# Altium PCB 2layer.PcbDoc
Units mil, origin at the board's own origin, x right, y up, seen from the top; angles counter-clockwise.
Board outline 6000 x 4000 mil, 2 copper layers (Top Layer, Bottom Layer); 88 components, 70 nets, 356 pads, 0 vias.
Unrouted connection lines stored in the file: 246.
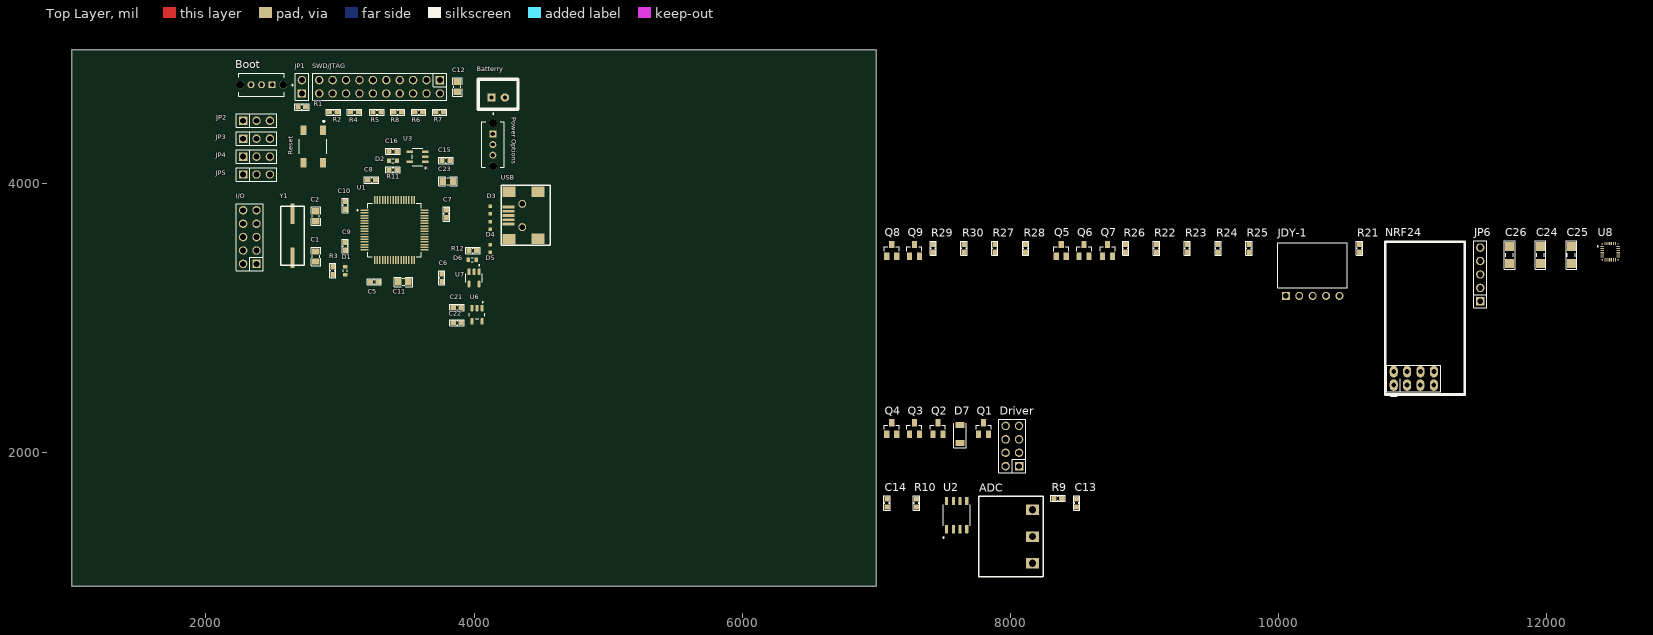
[diagram p0: Top Layer view]
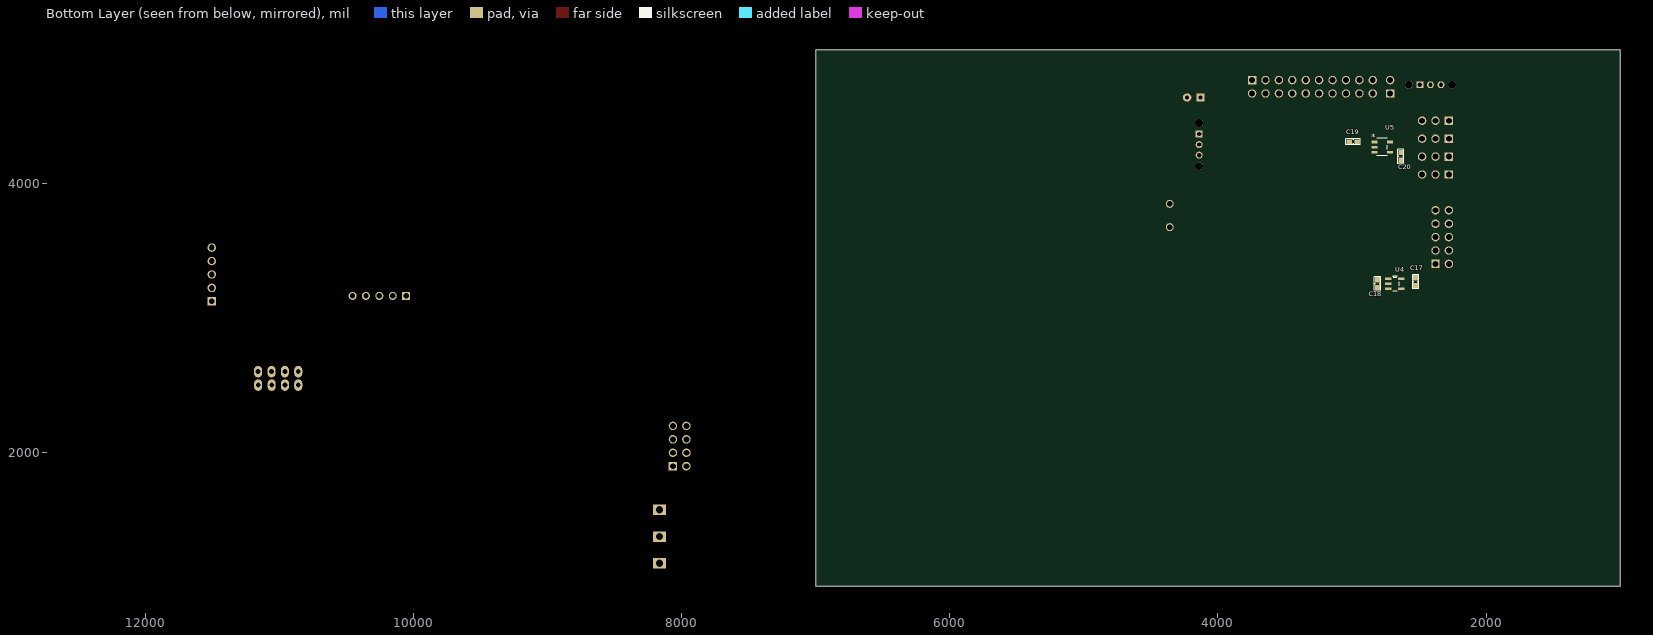
[diagram p1: Bottom Layer view, seen from below]

## Layer stack, top to bottom
Top Solder: solder mask 0.4, Solder Resist, Dk 3.5
Top Layer: signal copper 1.4
Dielectric 1: dielectric 12.6, FR-4, Dk 4.8
Bottom Layer: signal copper 1.4
Bottom Solder: solder mask 0.4, Solder Resist, Dk 3.5

## Board outline
1000,1000 7000,1000 7000,5000 1000,5000

## Design rules (kind name [scope] priority, off if disabled: settings)
Clearance [All] p1: gap=10 ignorepadtopadclearanceinfootprint=FALSE except(0: Arc-Hole Track-Hole SMDPad-Hole THPad-Hole Via-Hole Fill-Hole Poly-Hole Region-Hole Text-Hole)
DiffPairsRouting [All] p1: maxlimit=10 minlimit=10 mostfreqgap=10 toplayer_minwidth=15 toplayer_maxwidth=15 toplayer_prefwidth=15 bottomlayer_minwidth=15 bottomlayer_maxwidth=15 bottomlayer_prefwidth=15 maxuncoupledlength=500
PolygonConnect [All] p1: connectstyle=Relief reliefconductorwidth=10 reliefentries=4 polygonreliefangle="90 Angle" airgapwidth=10
RoomDefinition PWR_SRC [InComponentClass('PWR_SRC')] p1: confinementstyle=ConfineIn formatcopy=TRUE lockcomponents=FALSE outline 7045,3735 13215,3735 13215,4315 7045,4315
RoomDefinition STM32_MCU [InComponentClass('STM32_MCU')] p2: confinementstyle=ConfineIn formatcopy=TRUE lockcomponents=FALSE outline 7045,4365 13750,4365 13750,5485 7045,5485
RoomDefinition Peripherial [InComponentClass('Peripherial')] p3: confinementstyle=ConfineIn formatcopy=TRUE lockcomponents=FALSE outline 7045,2405 12565,2405 12565,3685 7045,3685
RoomDefinition Driver [InComponentClass('Driver')] p4: confinementstyle=ConfineIn formatcopy=TRUE lockcomponents=FALSE outline 7045,1835 8260,1835 8260,2355 7045,2355
RoomDefinition ADC [InComponentClass('ADC')] p5: confinementstyle=ConfineIn formatcopy=TRUE lockcomponents=FALSE outline 7045,1060 8645,1060 8645,1785 7045,1785
RoutingVias [All] p1: holewidth=28 width=50 viastyle="Through Hole" minholewidth=28 minwidth=50 maxholewidth=28 maxwidth=50
SolderMaskExpansion [All] p1: expansion=4 istentingtop=FALSE
Width [All] p1: maxlimit=10 minlimit=10 preferedwidth=10
29 further rules are at their usual default settings.

## Classes and differential pairs
differential pair class diff90: USB
component class STM32_MCU: Boot C1 C2 C5 C6 C7 C8 C9 C10 C11 C12 D1 I/O JP1 JP2 JP3 JP4 JP5 R1 R2 R3 R4 R5 R6 R7 R8 Reset SWD/JTAG U1 Y1
component class PWR_SRC: Batterry C15 C16 C17 C18 C19 C20 C21 C22 C23 D2 D3 D4 D5 D6 "Power Options" R11 R12 U3 U4 U5 U6 U7 USB
component class Peripherial: C24 C25 C26 JDY-1 JP6 NRF24 Q5 Q6 Q7 Q8 Q9 R21 R22 R23 R24 R25 R26 R27 R28 R29 R30 U8
component class Driver: D7 Driver Q1 Q2 Q3 Q4
component class ADC: ADC C13 C14 R9 R10 U2
differential pair USB: +USB_P -USB_N

## Components (designator, comment, footprint, x,y, rotation, side; value= is the part's Value field where it differs from the comment)
ADC "CON 3 EDG5.08" "CON 3 3EDG5.08" 8165,1170 r90 top
Batterry "Batterry" XH2.54M-2 4130,4645 r0 top
Boot "OS102011MS2QN1" SW_OS102011MS2QN1 2415,4740 r180 top
C1 "20pF" "tu 0805" 2819.84,3458.95 r90 top
C2 "20pF" "tu 0805" 2819.84,3759.38 r270 top
C5 "103" "tu 0603" 3255.98,3269.87 r180 top
C6 "103" "tu 0603" 3760,3300 r90 top
C7 "103" "tu 0603" 3794.06,3777.32 r270 top
C8 "103" "tu 0603" 3235.47,4030 r180 top
C9 "103" "tu 0603" 3040,3534.62 r270 top
C10 "103" "tu 0603" 3040,3840 r90 top
C11 "225" "tu 0805" 3472.77,3269.87 r180 top
C12 "225" "tu 0805" 3875,4725 r270 top
C13 "470pF" "tu 0603" 8495,1620 r90 top
C14 "470pF" "tu 0603" 7080,1620 r90 top
C15 "105" "tu 0603" 3790,4175 r0 top
C16 "105" "tu 0603" 3395,4243.1 r180 top
C17 "105" "tu 0603" 2525,3270 r90 bottom
C18 "105" "tu 0603" 2810,3255 r270 bottom
C19 "105" "tu 0603" 2991.34,4314.48 r0 bottom
C20 "105" "tu 0603" 2635,4205.47 r270 bottom
C21 "105" "tu 0603" 3873.1,3078.99 r180 top
C22 "105" "tu 0603" 3873.1,2965.35 r180 top
C23 "10pF" "tu 0805" 3805,4020 r180 top
C24 "104" "tu 1206" 11955,3470 r90 top
C25 "104" "tu 1206" 12185,3470 r90 top
C26 "104" "tu 1206" 11725,3470 r90 top
D1 "LED GREEN" J1-0603 3038.62,3352.98 r90 top
D2 "LED GREEN" J1-0603 3395,4173.62 r180 top
D3 "AVRL161A1R1NTA" TVS_AVRL161A1R1NTA 4120,3806.18 r90 top
D4 "AVRL161A1R1NTA" TVS_AVRL161A1R1NTA 4120,3690 r270 top
D5 "AVRL161A1R1NTA" TVS_AVRL161A1R1NTA 4120,3518.75 r270 top
D6 "LED RED" J1-0603 3985.47,3435 r0 top
D7 "Schottky-Diode" SOD-80_MiniMELF_Glass 7625,2135 r90 top value=Shottky-Diode
Driver "JP 2x4 2.54" "JP 2x4 DT" 8015,2045 r90 top
I/O "JP 2x5 2.54" "JP 2x5 DT" 2326.87,3603.61 r90 top
JDY-1 "JP 1x5 2.54" "JP 1x5 CC" 10255,3165 r0 top
JP1 "JP 1x2 2.54" "JP 1x2 DT" 2715.33,4675 r90 top
JP2 "JP 1x3 2.54" "JP 1x3 DT" 2276.87,4472.15 r0 top
JP3 "JP 1x3 2.54" "JP 1x3 DT" 2276.87,4337.94 r0 top
JP4 "JP 1x3 2.54" "JP 1x3 DT" 2276.87,4203.78 r0 top
JP5 "JP 1x3 2.54" "JP 1x3 DT" 2276.87,4070.78 r0 top
JP6 "JP 1x5 2.54" "JP 1x5 DT" 11505,3125 r90 top
NRF24 "NRF24L01 Module" NRF24L01 10860,2500 r0 top
"Power Options" "OS102011MS2QN1" SW_OS102011MS2QN1 4140,4293.74 r270 top
Q1 "SI2312" SOT23 7800,2175 r0 top
Q2 "SI2312" SOT23 7460,2175 r0 top
Q3 "SI2312" SOT23 7285,2175 r0 top
Q4 "SI2312" SOT23 7115,2175 r0 top
Q5 "SI2312" SOT23 8380,3505 r0 top
Q6 "SI2312" SOT23 8550,3505 r0 top
Q7 "SI2312" SOT23 8725,3505 r0 top
Q8 "SI2312" SOT23 7115,3505 r0 top
Q9 "SI2312" SOT23 7285,3505 r0 top
R1 "10k" "tro smd 0603" 2715.33,4574.12 r0 top
R2 "10k" "tro smd 0603" 2950,4535 r0 top
R3 "1k" "tro smd 0603" 2945.81,3352.98 r90 top
R4 "10k" "tro smd 0603" 3108.2,4535.6 r0 top
R5 "10k" "tro smd 0603" 3275.99,4535.6 r0 top
R6 "10k" "tro smd 0603" 3587.2,4535.6 r0 top
R7 "10k" "tro smd 0603" 3742.94,4535.6 r0 top
R8 "10k" "tro smd 0603" 3430.73,4535.6 r180 top
R9 "3.9k" "tro smd 0603" 8355,1655 r0 top
R10 "3.9k" "tro smd 0603" 7300,1620 r90 top
R11 "1k" "tro smd 0603" 3395,4105.39 r0 top
R12 "1k" "tro smd 0603" 3991.26,3504.05 r0 top
R21 "2.2k" "tro smd 0603" 10605,3520 r90 top
R22 "2.2k" "tro smd 0603" 9090,3520 r90 top
R23 "2.2k" "tro smd 0603" 9320,3520 r90 top
R24 "2.2k" "tro smd 0603" 9550,3520 r90 top
R25 "2.2k" "tro smd 0603" 9780,3520 r90 top
R26 "2.2k" "tro smd 0603" 8860,3520 r90 top
R27 "2.2k" "tro smd 0603" 7885,3520 r90 top
R28 "2.2k" "tro smd 0603" 8115,3520 r90 top
R29 "2.2k" "tro smd 0603" 7425,3520 r90 top
R30 "2.2k" "tro smd 0603" 7655,3520 r90 top
Reset "SKQGAFE010" SW_SKQGAFE010 2800,4280 r270 top
SWD/JTAG "JP 2x10 2.54" "JP 2x10 DT" 3295,4725 r180 top
U1 "STM32F446RET6" QFP50P1200X1200X160-64N 3406.1,3656.38 r0 top
U2 "OPA2335AID" SOIC127P599X175-8N 7600,1530 r90 top
U3 "TPS73630DBVR" DBV5-M 3577.25,4202.4 r180 top
U4 "LT6650IS5#TRPBF" SOT95P280X100-5N 2680,3255 r180 bottom
U5 "TPS73630DBVR" DBV5-M 2775,4275 r180 bottom
U6 "TPS73618DBVTG4" SOT95P280X145-5N 4022.4,3024.41 r270 top
U7 "MAX1555EZK+T" SOT95P275X110-5N 4000,3299.33 r270 top
U8 "ICM-20948" QFN40P300X300X105-24N 12475,3495 r0 top
USB "MINI_USB_Grounding" MINI_USB 4257.36,3701.42 r180 top
Y1 "FOXSDLF/160-20" SMD_Crystal 2733,3391.89 r90 top

## Footprints (in the part's own frame and the unit in brackets; to place one, negate y for a bottom-side part, rotate by r counter-clockwise, add the part's x,y. Pads: shape width x height; smd on the part's side, far side on the other; paste and mask are expansions set on the pad)
"CON 3 3EDG5.08" [mm]
  rect 2x2.5 hole 1.4: 1(0,0) 2(5.08,0) 3(10.173,0)
  silkscreen extent -2.54,-2.03 12.71,10.16, body extent -2.5,-1.75 12.67,10.25, height 3.15
DBV5-M [mil]
  rect 46.5x20 smd paste+0 mask+0: 1(-57.75,37.4) 2(-57.75,0) 3(-57.75,-37.4) 4(57.75,-37.4) 5(57.75,37.4)
  silkscreen extent -40,-65 40,65, body extent -59,-60 59,60, height 57
J1-0603 [mm] "Chip Resistor, Body 1.6x0.8mm, IPC High Density"
  rect 0.7x0.9 smd: 1(-0.75,0) 2(0.75,0)
  silkscreen extent -0.2,-0.35 0.2,0.35, body extent -0.85,-0.48 0.85,0.48, height 0.9
"JP 1x2 DT" [mm] "2 pins, 1 row, straight, gold plating"
  rect 1.6x1.6 hole 1.1: 1(0,0)
  round 1.6 hole 1.1: 2(2.54,0)
  silkscreen extent -1.27,-1.27 3.81,1.27, body extent -1.27,-1.27 3.81,1.27, height 8.54
"JP 1x3 DT" [mm]
  rect 1.6x1.6 hole 1.1: 1(0,0)
  round 1.6 hole 1.1: 2(2.54,0) 3(5.08,0)
  silkscreen extent -1.27,-1.27 6.35,1.27, body extent -1.27,-1.27 6.35,1.27, height 8.54
"JP 1x5 CC" [mm]
  rect 1.52x1.52 hole 1.02: 1(-5.08,0)
  round 1.52 hole 1.02: 2(-2.54,0) 3(0,0) 4(2.54,0) 5(5.08,0)
  silkscreen extent -6.6,1.52 6.6,10.05, body extent -6.6,-0.25 6.6,10.05, height 2.51
"JP 1x5 DT" [mm] "5 pins, 1 row, straight, gold plating"
  rect 1.6x1.6 hole 1.1: 1(0,0)
  round 1.6 hole 1.1: 2(2.54,0) 3(5.08,0) 4(7.62,0) 5(10.16,0)
  silkscreen extent -1.27,-1.27 11.43,1.27, body extent -1.27,-1.27 11.43,1.27, height 8.54
"JP 2x4 DT" [mm]
  rect 1.61x1.6 hole 1.1: 1(-3.81,-1.27)
  oval 1.61x1.6 hole 1.1: 2(-1.27,-1.27) 3(1.27,-1.27) 4(3.81,-1.27) 5(3.81,1.27) 6(1.27,1.27) 7(-1.27,1.27) 8(-3.81,1.27)
  silkscreen extent -5.08,-2.54 5.08,2.54, body extent -5.08,-2.54 5.08,2.54, height 8.55
"JP 2x5 DT" [mm] "10 pins, dual pin, straight, gold plating"
  rect 1.6x1.6 hole 1.1: 1(-5.08,-1.27)
  round 1.6 hole 1.1: 2(-2.54,-1.27) 3(0,-1.27) 4(2.54,-1.27) 5(5.08,-1.27) 6(5.08,1.27) 7(2.54,1.27) 8(0,1.27) 9(-2.54,1.27) 10(-5.08,1.27)
  silkscreen extent -6.35,-2.54 6.35,2.54, body extent -6.35,-2.54 6.35,2.54, height 8.55
"JP 2x10 DT" [mm] "20 pins, dual pin, straight, gold plating"
  rect 1.6x1.6 hole 1.1: 1(-11.43,-1.27)
  round 1.6 hole 1.1: 2(-8.89,-1.27) 3(-6.35,-1.27) 4(-3.81,-1.27) 5(-1.27,-1.27) 6(1.27,-1.27) 7(3.81,-1.27) 8(6.35,-1.27) 9(8.89,-1.27) 10(11.43,-1.27) 11(11.43,1.27) 12(8.89,1.27) 13(6.35,1.27) 14(3.81,1.27) 15(1.27,1.27) 16(-1.27,1.27) 17(-3.81,1.27) 18(-6.35,1.27) 19(-8.89,1.27) 20(-11.43,1.27)
  silkscreen extent -12.7,-2.54 12.7,2.54, body extent -12.7,-2.54 12.7,2.54, height 8.55
MINI_USB [mm]
  rect 2.3x0.5 smd: 1(0,0) 2(0,-0.81) 3(0,-1.61) 4(0,-2.41) 5(0,-3.22)
  rect 2.5x2 smd: 6(-0.1,-6.07) 7(-5.6,-6.07) 8(-5.58,2.83) 9(-0.1,2.85)
  round 1.5 hole 1 unplated: ""(-2.59,0.6) ""(-2.59,-3.82)
  silkscreen extent -7.85,-7.31 1.41,4.07
NRF24L01 [mil]
  oval 60x86 hole 36: 1(0,0) 2(0,100) 3(99,0) 4(100,100) 5(198,0) 6(199.5,100) 7(299,0) 8(300,100)
  silkscreen extent -63,-86 530,1069, body extent -73,-74 518,1068, height 588
QFN40P300X300X105-24N [mm]
  rrect25% 0.64x0.22 smd: 1(-1.545,1) 2(-1.545,0.6) 3(-1.545,0.2) 4(-1.545,-0.2) 5(-1.545,-0.6) 6(-1.545,-1) 13(1.545,-1) 14(1.545,-0.6) 15(1.545,-0.2) 16(1.545,0.2) 17(1.545,0.6) 18(1.545,1)
  rrect25% 0.22x0.64 smd: 7(-1,-1.545) 8(-0.6,-1.545) 9(-0.2,-1.545) 10(0.2,-1.545) 11(0.6,-1.545) 12(1,-1.545) 19(1,1.545) 20(0.6,1.545) 21(0.2,1.545) 22(-0.2,1.545) 23(-0.6,1.545) 24(-1,1.545)
  silkscreen extent -2.5,-1.5 1.5,1.5, body extent -1.5,-1.5 1.5,1.5, height 1
QFP50P1200X1200X160-64N [mm]
  rrect50% 1.56x0.28 smd: 1(-5.68,3.75) 2(-5.68,3.25) 3(-5.68,2.75) 4(-5.68,2.25) 5(-5.68,1.75) 6(-5.68,1.25) 7(-5.68,0.75) 8(-5.68,0.25) 9(-5.68,-0.25) 10(-5.68,-0.75) 11(-5.68,-1.25) 12(-5.68,-1.75) 13(-5.68,-2.25) 14(-5.68,-2.75) 15(-5.68,-3.25) 16(-5.68,-3.75) 33(5.68,-3.75) 34(5.68,-3.25) 35(5.68,-2.75) 36(5.68,-2.25) 37(5.68,-1.75) 38(5.68,-1.25) 39(5.68,-0.75) 40(5.68,-0.25) 41(5.68,0.25) 42(5.68,0.75) 43(5.68,1.25) 44(5.68,1.75) 45(5.68,2.25) 46(5.68,2.75) 47(5.68,3.25) 48(5.68,3.75)
  rrect50% 0.28x1.56 smd: 17(-3.75,-5.68) 18(-3.25,-5.68) 19(-2.75,-5.68) 20(-2.25,-5.68) 21(-1.75,-5.68) 22(-1.25,-5.68) 23(-0.75,-5.68) 24(-0.25,-5.68) 25(0.25,-5.68) 26(0.75,-5.68) 27(1.25,-5.68) 28(1.75,-5.68) 29(2.25,-5.68) 30(2.75,-5.68) 31(3.25,-5.68) 32(3.75,-5.68) 49(3.75,5.68) 50(3.25,5.68) 51(2.75,5.68) 52(2.25,5.68) 53(1.75,5.68) 54(1.25,5.68) 55(0.75,5.68) 56(0.25,5.68) 57(-0.25,5.68) 58(-0.75,5.68) 59(-1.25,5.68) 60(-1.75,5.68) 61(-2.25,5.68) 62(-2.75,5.68) 63(-3.25,5.68) 64(-3.75,5.68)
  silkscreen extent -7.1,-5.1 5.1,5.1
SMD_Crystal [mm]
  rect 3.9x0.75 smd: 1(1.476,2.235) 2(9.776,2.235)
  silkscreen extent 0,0 11.25,4.47
SOD-80_MiniMELF_Glass [mm]
  rrect25% 1.2x1.7 smd: A(1.7,0) K(-1.7,0)
  silkscreen extent -2.65,-1.2 2,1.2, body extent -1.76,-0.74 1.74,0.74, height 1.46
SOIC127P599X175-8N [mm]
  rrect25% 1.58x0.6 smd: 1(-2.67,1.905) 2(-2.67,0.635) 3(-2.67,-0.635) 4(-2.67,-1.905) 5(2.67,-1.905) 6(2.67,-0.635) 7(2.67,0.635) 8(2.67,1.905)
  silkscreen extent -4.35,-2.52 1.99,2.6, body extent -3,-2.45 3,2.45, height 1.75
SOT23 [mm]
  rect 1x1.4 smd: 1(-0.95,-1.1) 2(0.95,-1.1) 3(0,1.1)
  silkscreen extent -1.42,-0.15 1.42,0.66, body extent -1.18,-1.46 1.18,1.46, height 1.25
SOT95P275X110-5N [mm]
  rrect50% 1.24x0.55 smd: 1(-1.16,0.95) 2(-1.16,0) 3(-1.16,-0.95) 4(1.16,-0.95) 5(1.16,0.95)
  silkscreen extent -2.5,-1.55 0.83,1.55
SOT95P280X100-5N [mil]
  rect 48x20 smd: 1(-48,37) 2(-48,0) 3(-48,-37) 4(48,-37) 5(48,37)
  silkscreen extent -16,-57 34,57, body extent -55,-57 55,57, height 39
SOT95P280X145-5N [mm]
  rrect50% 1.21x0.59 smd: 1(-1.255,0.95) 2(-1.255,0) 3(-1.255,-0.95) 4(1.255,-0.95) 5(1.255,0.95)
  silkscreen extent -2.51,-1.45 0.8,1.45, body extent -1.4,-1.45 1.4,1.45, height 1.45
SW_OS102011MS2QN1 [mm]
  rect 1.308x1.308 hole 0.8: 1(-2,0)
  round 1.308 hole 0.8: 2(0,0) 3(2,0)
  round 1.5 hole 1.5 unplated: ""(-4.1,0) ""(4.1,0)
  silkscreen extent -5.95,-2.15 4.3,2.15, body extent -4.3,-2.15 4.3,2.15, height 4.4
SW_SKQGAFE010 [mm]
  rect 1.8x1.1 smd: 1(-3.1,1.85) 2(3.1,1.85) 3(-3.1,-1.85) 4(3.1,-1.85)
  silkscreen extent -4.9,-2.6 1.4,2.6
"tro smd 0603" [mm] "Chip Capacitor, 2-Leads, Body 1,60x0,80mm, IPC Medium Density"
  rect 1x0.95 smd mask+0.076: 1(-0.75,0) 2(0.75,0)
  silkscreen extent -1.35,-0.58 1.37,0.58, body extent -0.82,-0.42 0.82,0.43, height 0.44
"tu 0603" [mm] "Chip Capacitor, 2-Leads, Body 1,60x0,80mm, IPC Medium Density"
  rect 1x0.95 smd mask+0.076: 1(-0.75,0) 2(0.75,0)
  silkscreen extent -1.35,-0.58 1.37,0.58, body extent -0.8,-0.4 0.8,0.4, height 0.9
"tu 0805" [mm] "Compoment SMD 80x50mil"
  rect 1.2x1.4 smd: 1(-0.946,-0.003) 2(0.954,-0.003)
  silkscreen extent -1.75,-0.89 1.75,0.89, body extent -1.01,-0.64 1.01,0.63, height 0.61
"tu 1206" [mm]
  rect 1.7x1.7 smd: 1(-1.65,0) 2(1.65,0)
  silkscreen extent -2.67,-1.02 2.67,1.02, body extent -1.57,-0.8 1.63,0.8, height 0.94
TVS_AVRL161A1R1NTA [mm]
  rect 0.7x0.7 smd: 1(-0.7,0) 2(0.7,0)
  body extent -0.8,-0.4 0.8,0.4, height 0.95
XH2.54M-2 [mm]
  rect 1.6x1.6 hole 0.8: 1(0,0)
  round 1.6 hole 0.8: 2(2.54,0)
  silkscreen extent -2.48,-2.26 5.02,3.46, body extent -2.48,-2.26 5.02,3.48, height 6.91

## Part data
ADC: "Cắm", Chung_Loai=Cắm, Don_Vi=Con, Ma_Hang=MH000760, Ten_Linh_Kien="CON 3 2EDG5.08-3P 5.08MM ( Xanh Cong)"
Batterry: library part "Header 2P 2.54 Duc Thang", "Cắm", Chung_Loai=Cắm, Don_Vi=Con, Ma_Hang=MH001283, Ten_Linh_Kien="Header 2P XH2.54-2P Đực Thẳng"
Boot "Power Options": "Switch Slide ON ON SPDT Top Slide 0.1A 12VDC 10000Cycles PC Pins Thru-Hole Bulk", Package=None, Availability=Unavailable, MF="{'manufacturer': u'C&K'}", MP=OS102011MS2QN1, Price=None
C1 C2: library part "Tu 0805 20pF 50V 10%", "Dán", Chung_Loai=Dán, Don_Vi=Con, Ma_Hang=MH004558, So_Chan=2, Ten_Linh_Kien="Tụ 0805 20P 10% 50V"
C5 C6 C7 C8 C9 C10: library part "Tu 0603 103 50V 10%", "Dán", Chung_Loai=Dán, Don_Vi=Con, Ma_Hang=MH004567, So_Chan=2, Ten_Linh_Kien="Tụ 0603 103-10nF 10% 50V"
C11 C12: library part "Tu 0805 225 25V 10%", "Dán", Chung_Loai=Dán, Don_Vi=Con, Ma_Hang=MH007483, So_Chan=2, Ten_Linh_Kien="Tụ 0805 225-2.2uF 25V 10%"
C13 C14: library part "Tu 0603 470pF 50V 10%", "Dán", Chung_Loai=Dán, Don_Vi=Con, Ma_Hang=MH004571, So_Chan=2, Ten_Linh_Kien="Tụ 0603 470P 50V 10%"
C15 C16 C17 C18 C19 C20 C21 C22: library part "Tu 0603 105 16V 20%", "Dán", Chung_Loai=Dán, Don_Vi=Con, Ma_Hang=MH004574, So_Chan=2, Ten_Linh_Kien="Tụ 0603 105-1uF 20% 16V"
C23: library part "Tu 0805 10pF 50V 10%", "Dán", Chung_Loai=Dán, Don_Vi=Con, Ma_Hang=MH004554, So_Chan=2, Ten_Linh_Kien="Tụ 0805 10P 10% 50V"
C24 C25 C26: library part "Tu 1206 104 50V 20%", "Dán", Chung_Loai=Dán, Don_Vi=Con, Ma_Hang=MH004544, So_Chan=2, Ten_Linh_Kien="Tụ 1206 104-0.1uF 20% 50V"
D1 D2 D6: library part Diode, "Default Diode", PackageDocument=Sep-1996, Code_JEDEC=DO-214-AB, LatestRevisionDate=17-Jul-2002, LatestRevisionNote="Re-released for DXP Platform.", PackageReference=SMC, Published=8-Jun-2000, Publisher="Altium Limited"
D3 D4 D5 U2 U6 U7: Package=None, Availability=Unavailable, Price=None
  D3 D4 D5: MF="{'manufacturer': u'TDK'}", MP=AVRL161A1R1NTA
  U2: MF="{'manufacturer': u'Texas Instruments'}", MP=OPA2335AID
  U6: MF="{'manufacturer': u'Texas Instruments'}", MP=TPS73618DBVTG4
  U7: MF="{'manufacturer': u'Analog Devices'}", MP=MAX1555EZK+
Driver: library part "JP 2x4 2.54 Duc Thang", "Cắm", Chung_Loai=Cắm, Don_Vi=Con, Ma_Hang=MH002686, Ten_Linh_Kien="Jump Đôi Đực 2.54MM 2x40P Thẳng 11MM"
I/O: library part "JP 2x5 2.54 Duc Thang", "Cắm", Chung_Loai=Cắm, Don_Vi=Con, Ma_Hang=MH002686, Ten_Linh_Kien="Jump Đôi Đực 2.54MM 2x40P Thẳng 11MM"
JDY-1: library part "JP 1x5 2.54 Cai Cong", "Cắm", Chung_Loai=Cắm, Don_Vi=Con, Ma_Hang=MH001265, Ten_Linh_Kien="Jump Đơn Cái 2.54MM 1x40P Cong"
JP1: library part "JP 1x2 2.54 Duc Thang", "Cắm", Chung_Loai=Cắm, Don_Vi=Con, Ma_Hang=MH000903, Ten_Linh_Kien="Jump Đơn Đực 2.54MM 1x40P Thẳng 11MM"
JP2 JP3 JP4 JP5: library part "JP 1x3 2.54 Duc Thang", "Cắm", Chung_Loai=Cắm, Don_Vi=Con, Ma_Hang=MH000903, Ten_Linh_Kien="Jump Đơn Đực 2.54MM 1x40P Thẳng 11MM"
JP6: library part "JP 1x5 2.54 Duc Thang", "Cắm", Chung_Loai=Cắm, Don_Vi=Con, Ma_Hang=MH000903, Ten_Linh_Kien="Jump Đơn Đực 2.54MM 1x40P Thẳng 11MM"
Q1 Q2 Q3 Q4 Q5 Q6 Q7 Q8 Q9: "<b>N-Channel MOSFET</b>    <a href=\"https://pricing.snapeda.com/parts/SI2312/Micro%20Commercial%20Components/view-part?ref=eda\">Check availability</a> <a href=\"https://pricing.snapeda.com/parts/SI2312/Micro%20Commercial%20Components/view-part?ref=eda\">Check availability</a>", Package=None, Availability=Unavailable, MF="{'manufacturer': u'Micro Commercial Components'}", MP=SI2312-TP, Price=None
R1 R2 R4 R5 R6 R7 R8: library part "Tro 0603 1% 10k", "Dán", Chung_Loai=Dán, Don_Vi=Con, Ma_Hang=MH006333, So_Chan=2, Ten_Linh_Kien="Trở 0603 1% 10k"
R3 R12: library part "Tro 0603 1% 1k", "Dán", Chung_Loai=Dán, Don_Vi=Con, Ma_Hang=MH006334, So_Chan=2, Ten_Linh_Kien="Trở 0603 1% 1k"
R9 R10: library part "Tro 0603 1% 3.9k", "Dán", Chung_Loai=Dán, Don_Vi=Con, Ma_Hang=MH005793, So_Chan=2, Ten_Linh_Kien="Trở 0603 1% 3.9k"
R11: library part "Tro 0603 5% 1k", "Dán", Chung_Loai=Dán, Don_Vi=Con, Ma_Hang=MH006319, So_Chan=2, Ten_Linh_Kien="Trở 0603 5% 1k"
R21 R22 R23 R24 R25 R26 R27 R28 R29 R30: library part "Tro 0603 5% 2.2k", "Dán", Chung_Loai=Dán, Don_Vi=Con, Ma_Hang=MH006321, So_Chan=2, Ten_Linh_Kien="Trở 0603 5% 2.2k"
Reset: "Switch Tactile N.O. SPST Button Gull Wing 0.05A 12VDC 0.98N SMD T/R", Package=None, Availability=Unavailable, MF="{'manufacturer': u'ALPS'}", MP=SKQGAFE010, Price=None
SWD/JTAG: library part "JP 2x10 2.54 Duc Thang", "Cắm", Chung_Loai=Cắm, Don_Vi=Con, Ma_Hang=MH002686, Ten_Linh_Kien="Jump Đôi Đực 2.54MM 2x40P Thẳng 11MM"
U1: "MCU 32-Bit STM32 ARM Cortex M4 RISC 512KB Flash 2.5V/3.3V 64-Pin LQFP Tray", Package=None, Availability=Unavailable, MF="{'manufacturer': u'STMicroelectronics'}", MP=STM32F446RET6, Price=None
U3 U5: "No Description Available", Mfr_Name="Texas Instruments", RefDes=RefDes, Type=Type
U4: "Micropower, 400mV Reference with Rail-to-Rail Buffer Amplifier", Package=None, Availability=Unavailable, MF="{'manufacturer': u'Analog Devices'}", MP=LT6650IS5#TRPBF, Price=None
U8: "Accelerometer, Gyroscope, Magnetometer, 9 Axis Sensor IÂ²C, SPI Output", Package=None, Availability=Unavailable, MF="{'manufacturer': u'TDK InvenSense'}", MP=ICM-20948, Price=None
Y1: library part "Crystal 16MHz 20pF 2-Pin", "Crystal 16MHz 20pF 2-Pin HC-49/SD", Package="HC49/US Fox", Digi-Key_Part_Number=631-1017-2-ND, Digi-Key_Purchase_URL=https://www.digikey.tw/product-detail/en/fox-electronics/FC4SDCBMF16.0-T1/631-1017-2-ND/1024609?utm_source=snapeda&utm_medium=aggregator&utm_campaign=symbol, MF=Fox, MP=FOXSDLF/160-20, SnapEDA_Link=https://www.snapeda.com/parts/FOXSDLF/160-20/Fox%20Electronics/view-part/?ref=snap
D7: Datasheet=https://diotec.com/de/produktliste/SBD.html, ki_description="Schottky Diode", ki_keywords=Schottky, Reference=D

## Nets (pads, with @x,y where several pads share a name; then routed paths per layer and width w, separated by ;. In a path a pad name is that pad's centre, name@x,y a point inside that pad or via, vN(x,y) a via of type N, cw(c..) or ccw(c..) an arc to the next point about the centre after c; other vN are vias at no path point)
0.4V: C18.1 U2.3 U2.5 U4.1 U4.5
+1.8V: C24.1 C25.1 Q5.1 Q6.1 Q7.1 Q8.1 Q9.1 R22.2 R24.2 R26.2 R29.2 R30.2 U6.5 U8.8 U8.13
+3.3V_STM32: C5.1 C6.1 C7.1 C8.1 C9.1 C10.1 C11.1 C12.1 C21.1 D2.1 JDY-1.2 JP1.1 NRF24.2 R1.2 R2.2 R3.2 R4.2 R5.2 R6.2 R7.2 R21.2 R23.2 R25.2 R27.2 R28.2 SWD/JTAG.1 SWD/JTAG.20 U1.1 U1.13 U1.19 U1.30 U1.32 U1.48 U1.64 U3.5 U6.1 U6.3
+5V: "Power Options.2" C15.1 C19.1 D7.K Driver.5 Driver.6 Driver.7 Driver.8 JP2.2 JP3.2 JP4.2 JP5.2 U3.1 U3.3 U5.1 U5.3
+AVCC: C17.1 U2.8 U4.4 U5.5
+V_Bat: "Power Options.1" Batterry.1 C23.1 U7.5
+V_USB: "Power Options.3" D5.1 R12.2 U7.1 USB.1
Boot: Boot.2 U1.60
GND: ADC.1 Batterry.2 Boot.3 C1.2 C2.2 C5.2 C6.2 C7.2 C8.2 C9.2 C10.2 C11.2 C12.2 C15.2 C16.2 C17.2 C18.2 C19.2 C20.2 C21.2 C22.2 C23.2 C24.2 C25.2 C26.2 D3.2 D4.2 D5.2 D6.2 JDY-1.1 JP2.1 JP3.1 JP4.1 JP5.1 NRF24.1 Q1.2 Q2.2 Q3.2 Q4.2 R8.1 R11.2 Reset.3 Reset.4 SWD/JTAG.11 SWD/JTAG.12 SWD/JTAG.13 SWD/JTAG.14 SWD/JTAG.15 SWD/JTAG.16 SWD/JTAG.17 SWD/JTAG.18 SWD/JTAG.19 U1.12 U1.18 U1.31 U1.47 U1.63 U2.4 U3.2 U4.2 U5.2 U6.2 U7.2 U8.18 U8.20 USB.5
IMU_CS: Q9.3 R28.1 U1.25
IMU_INT: Q5.3 R23.1 U1.26
IMU_MISO: JP6.5 Q7.2 R26.1 U8.9
IMU_MOSI: JP6.3 Q6.2 R24.1 U8.24
IMU_SCK: JP6.4 Q8.2 R29.1 U8.23
INPUT_1: ADC.3 C14.2 R10.1 U2.6
INPUT_2: ADC.2 C13.2 R9.1 U2.2
LED1: Driver.1 Q1.3
LED2: Driver.2 Q2.3
LED3: Driver.3 Q4.3
NetBoot_1: Boot.1 R1.1
NetC16_1: C16.1 U3.4
NetC20_1: C20.1 U5.4
NetC22_1: C22.1 U6.4
NetC26_1: C26.1 U8.10
NetD1_1: D1.1 R3.1
NetD1_2: D1.2 U1.16
NetD2_2: D2.2 R11.1
NetD6_1: D6.1 R12.1 U7.3
NetJP1_2: JP1.2 SWD/JTAG.10
NRF24_CE: NRF24.3 U1.17
NRF24_CSN: NRF24.4 U1.20
NRF24_INT: NRF24.8 U1.24
NRST: R2.1 Reset.1 Reset.2 SWD/JTAG.8 U1.7
OSC_IN: C1.1 U1.5 Y1.1
OSC_OUT: C2.1 U1.6 Y1.2
PA0: I/O.2 U1.14
PA1: I/O.1 U1.15
PB5: I/O.6 U1.57
PB6: JP2.3 U1.58
PB7: JP3.3 U1.59
PB8: JP4.3 U1.61
PB9: JP5.3 U1.62
PC0: I/O.4 U1.8
PC1: I/O.3 U1.9
PC2: C14.1 R10.2 U1.10 U2.7
PC3: C13.1 R9.2 U1.11 U2.1
PC6: Q3.1 U1.37
PC7: Q4.1 U1.38
PC8: Q2.1 U1.39
PC9: Q1.1 U1.40
PC10: I/O.10 U1.51
PC11: I/O.9 U1.52
PC12: I/O.8 U1.53
PC13: I/O.5 U1.2
PD2: I/O.7 U1.54
S_IMU_CS: JP6.2 Q9.2 R30.1 U8.22
S_IMU_INT: JP6.1 Q5.2 R22.1 U8.12
SPI_MISO: NRF24.7 Q7.3 R21.1 U1.22
SPI_MOSI: NRF24.6 Q6.3 R25.1 U1.23
SPI_SCK: NRF24.5 Q8.3 R27.1 U1.21
TCK: R5.1 SWD/JTAG.5 U1.49
TDI: R6.1 SWD/JTAG.3 U1.50
TDO: R4.1 SWD/JTAG.7 U1.55
TMS: R8.2 SWD/JTAG.4 U1.46
TRST: R7.1 SWD/JTAG.2 U1.56
UART_Rx: JDY-1.4 U1.43
UART_Tx: JDY-1.3 U1.42
USB_N: D4.1 U1.44 USB.2
USB_P: D3.1 U1.45 USB.3
Vibrator: D7.A Driver.4 Q3.3
pads on no net: "Power Options." Boot. JDY-1.5 SWD/JTAG.6 SWD/JTAG.9 U1.3 U1.4 U1.27 U1.28 U1.29 U1.33 U1.34 U1.35 U1.36 U1.41 U4.3 U7.4 U8.1 U8.2 U8.3 U8.4 U8.5 U8.6 U8.7 U8.11 U8.14 U8.15 U8.16 U8.17 U8.19 U8.21 USB. USB.4 USB.6 USB.7 USB.8 USB.9

## Text inside footprints (layer, text, board x,y; h text height)
U3: Top Overlay "*" at 3657.5,4150 h50 r180; Mechanical 13 "*" at 3614.25,4188 h50 r180
U5: Mechanical 13 "*" at 2812,4289.4 h50; Bottom Overlay "*" at 2855.25,4327.4 h50